# Altium PCB NANO.PcbDoc
Units mil, origin at the board's own origin, x right, y up, seen from the top; angles counter-clockwise.
Board outline 3144.78 x 2352.1 mil, 2 copper layers (Top Layer, Bottom Layer); 28 components, 29 nets, 155 pads, 73 vias.
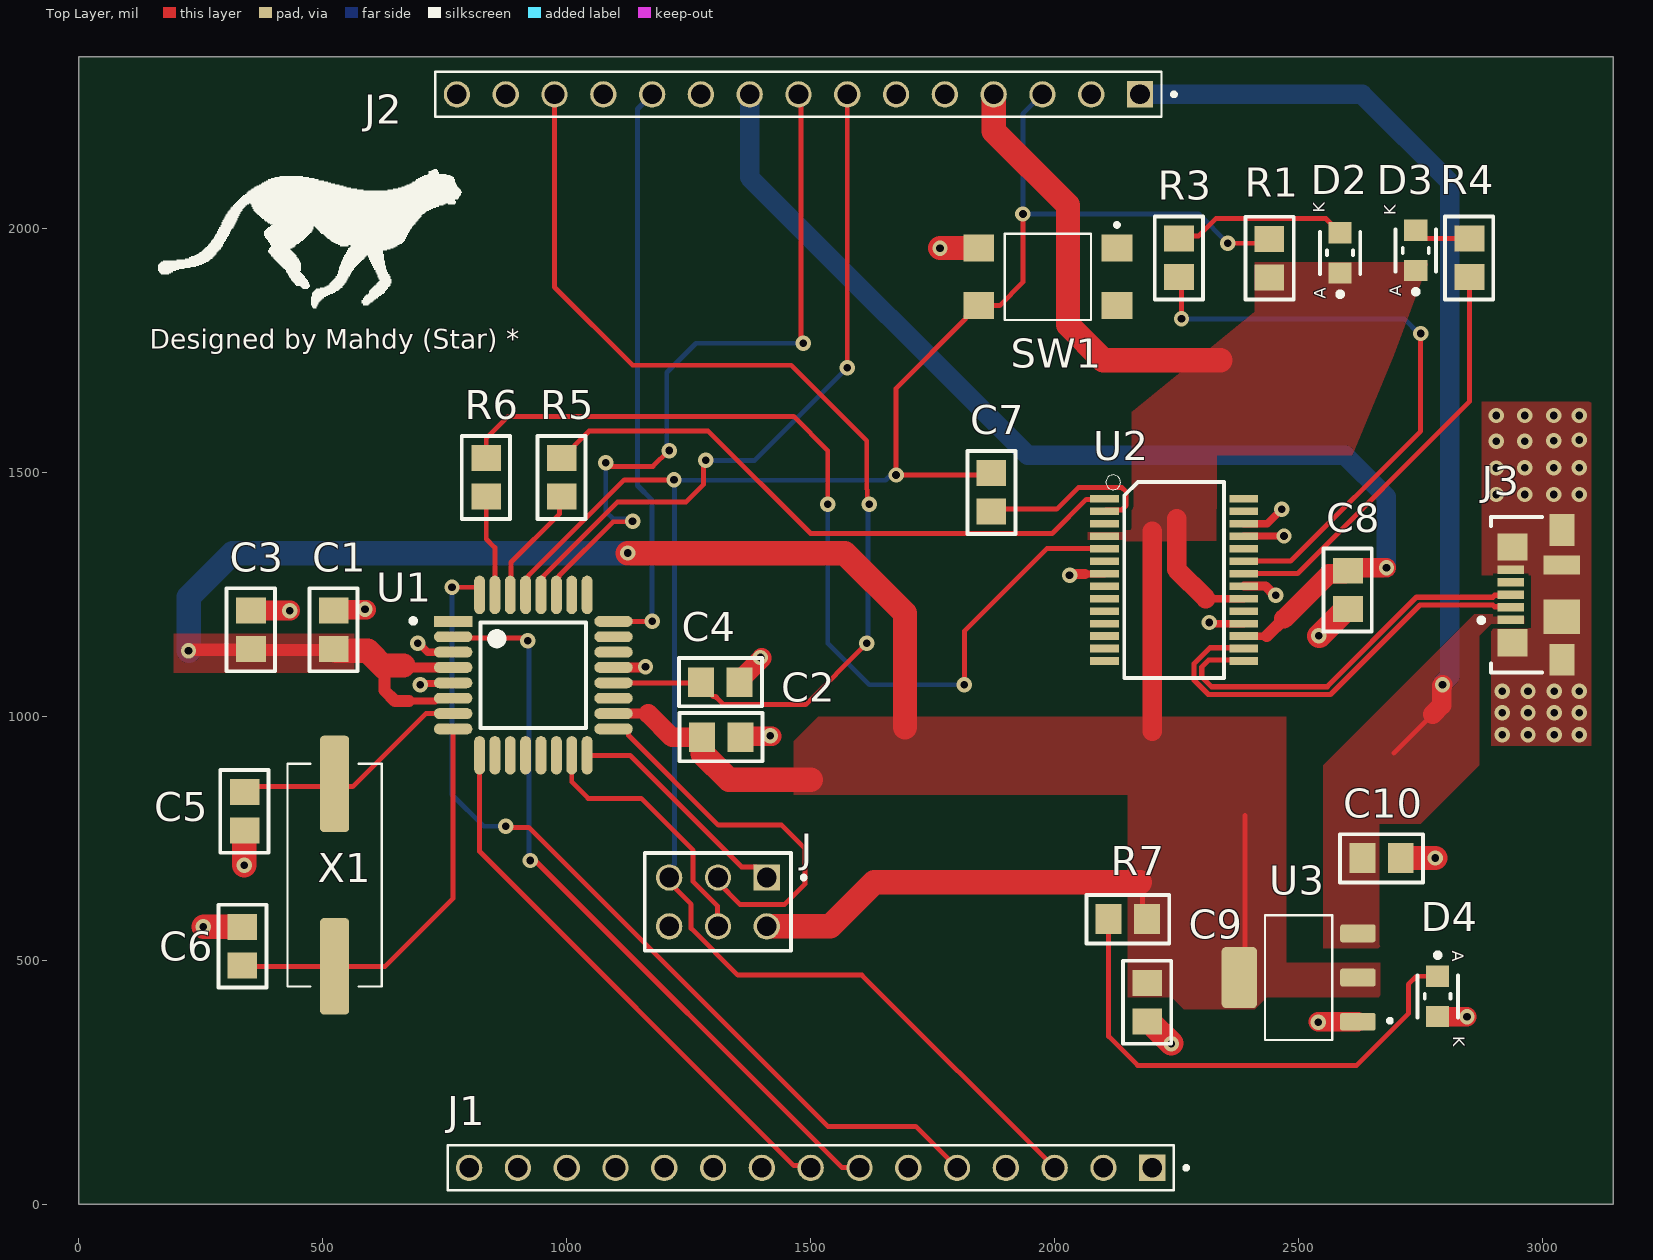
[diagram p0: Top Layer view]
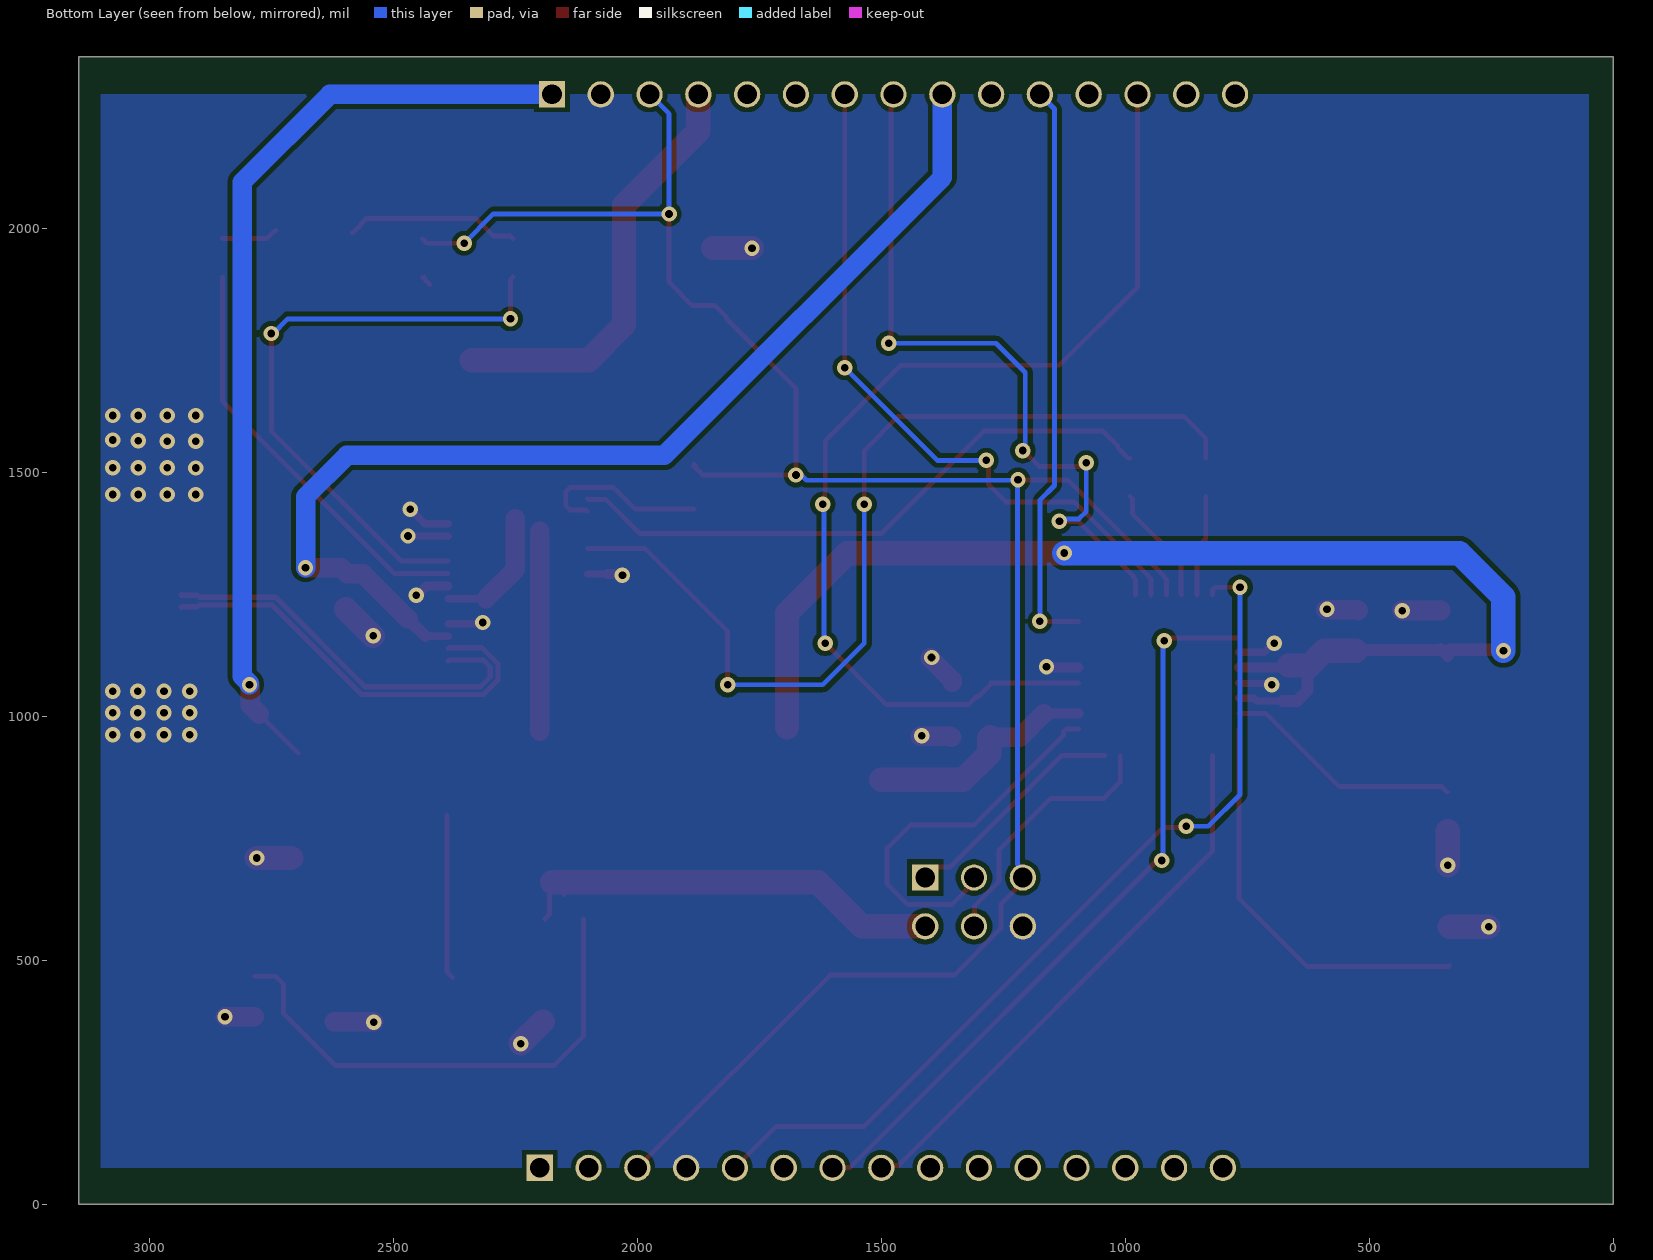
[diagram p1: Bottom Layer view, seen from below]
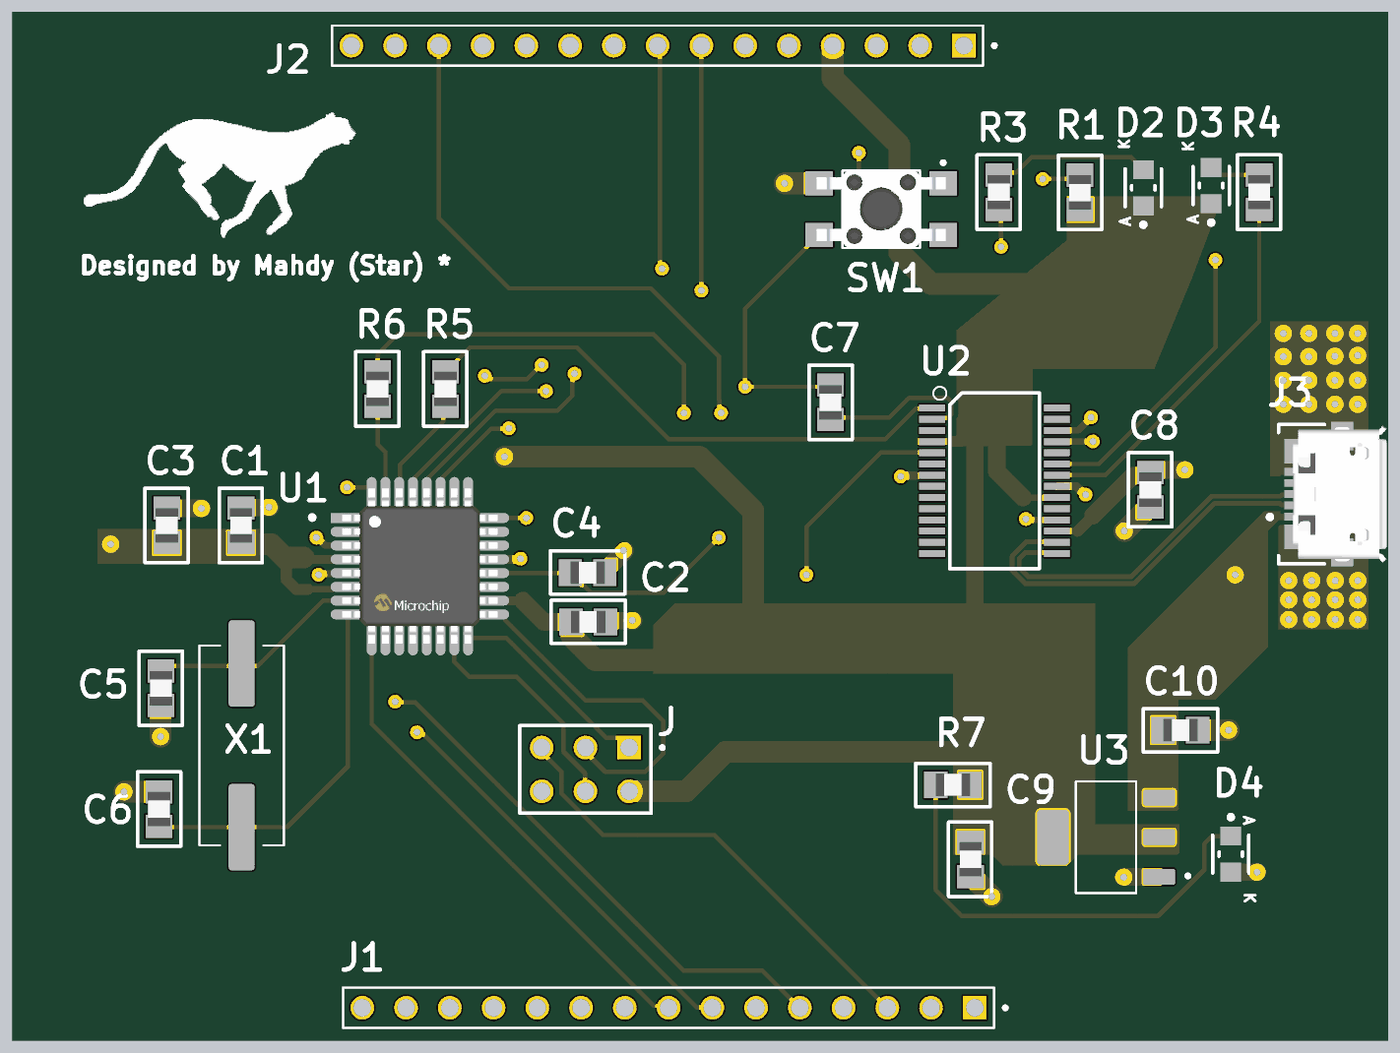
[diagram p2: 3D render of the assembled board from above, using the file's embedded part models]

## Layer stack, top to bottom
Top Solder: solder mask 0.4, Solder Resist, Dk 3.5
Top Layer: signal copper 1.4
Dielectric 1: dielectric 12.6, FR-4, Dk 4.8
Bottom Layer: signal copper 1.4
Bottom Solder: solder mask 0.4, Solder Resist, Dk 3.5

## Board outline
0,0 0,2352.1 3144.78,2352.1 3144.78,0

## Design rules (kind name [scope] priority, off if disabled: settings)
Clearance [All] p1: gap=8 ignorepadtopadclearanceinfootprint=FALSE except(0: Arc-Hole Track-Hole SMDPad-Hole THPad-Hole Via-Hole Fill-Hole Poly-Hole Region-Hole Text-Hole; 5: SMDPad-SMDPad)
DiffPairsRouting [All] p1: maxlimit=5 minlimit=5 mostfreqgap=5 toplayer_minwidth=10.97 toplayer_maxwidth=10.97 toplayer_prefwidth=10.97 bottomlayer_minwidth=10.97 bottomlayer_maxwidth=10.97 bottomlayer_prefwidth=10.97 impedanceprofiledriven=TRUE impedanceprofileid={1ABF0CBA-994F-42E9-B54F-6C99FAADA34D} impedanceprofilevalue=90.000000 maxuncoupledlength=500
MinimumSolderMaskSliver [All] p1: minsoldermaskwidth=0.5
PolygonConnect [All] p1: connectstyle=Direct reliefconductorwidth=10 reliefentries=4 polygonreliefangle="90 Angle" airgapwidth=10
RoutingVias [All] p1: holewidth=28 width=30 viastyle="Through Hole" minholewidth=10 minwidth=15 maxholewidth=30 maxwidth=50
SilkToSolderMaskClearance [IsPad] p1: minsilkscreentomaskgap=3 clearancetoexposedcopper=TRUE
SolderMaskExpansion [All] p1: expansion=4 istentingtop=FALSE
Width [All] p1: maxlimit=50 minlimit=10 preferedwidth=10
27 further rules are at their usual default settings.

## Classes and differential pairs
differential pair class DIFF90OHM: D
differential pair D: +D_P -D_N

## Components (designator, comment, footprint, x,y, rotation, side; value= is the part's Value field where it differs from the comment)
C1 "1uF" Capacitor 522.69,1177.9 r90 top
C2 "4.7uF" Capacitor 1316.38,957.28 r0 top
C3 "1uF" Capacitor 353.06,1177.9 r90 top
C4 "100nF" Capacitor 1315,1070 r0 top
C5 "22pF" Capacitor 339.95,805.63 r90 top
C6 "22pF" Capacitor 335,529.37 r270 top
C7 "100nF" Capacitor 1870,1459.37 r270 top
C8 "100nF" Capacitor 2601.06,1259.37 r90 top
C9 "1uF" Capacitor 2190,414.37 r90 top
C10 "1uF" Capacitor 2670,710 r180 top
D2 "LED Green Wurth Elektronik 150080GS75000" "LED 0508 Green SMT" 2585,1950 r90 top
D3 "LED Green Wurth Elektronik 150080GS75000" "LED 0508 Green SMT" 2740,1955 r90 top
D4 "LED Green Wurth Elektronik 150080GS75000" "LED 0508 Green SMT" 2785.09,426.45 r270 top
J "ICSP-6 Pins - 2 Rows" "ICSP 6 Pins-2 Rows" 1311.87,617.69 r180 top
J1 "15_Male_Pins" HDR_15Pins_Male 1500,75 r180 top
J2 "15_Male_Pins" HDR_15Pins_Male 1475,2275 r180 top
J3 "Micro USB Connector Molex  47346-0001" Molex_0_MFG 3025.94,1249.41 r90 top
R1 "1K Ohms" Capacitor 2440,1939.37 r270 top
R3 "1K Ohms" Capacitor 2255,1940 r90 top
R4 "1K Ohms" Capacitor 2850,1940 r90 top
R5 "1K Ohms" Capacitor 990,1490 r90 top
R6 "1K Ohms" Capacitor 835,1490 r90 top
R7 "1K Ohms" Capacitor 2150,585 r180 top
SW1 "Tactile Switch SPST-NO Top Actuated Surface Mount" SW_TL3305AF260QG 1980,1905 r270 top
U1 "ATMEGA328P-AU-Microchip" ATMEGA328P-AU 930,1085 r0 top
U2 "INTERFACE-FT232RL(SSOP28)-USB" SSOP28-0.65-10.2X5.2MM-USB 2245,1290 r270 top
U3 "Reg_5V_LM1117IMPX-5.0" LVoltageRegulator 2500,465 r180 top
X1 "Crystal Oscillator 16Mhz" "Crystal Oscillator 16Mhz" 529.25,670 r270 top

## Footprints (in the part's own frame and the unit in brackets; to place one, negate y for a bottom-side part, rotate by r counter-clockwise, add the part's x,y. Pads: shape width x height; smd on the part's side, far side on the other; paste and mask are expansions set on the pad)
ATMEGA328P-AU [mil]
  rect 78.91x22.28 smd paste+0 mask+0: 1(-162.82,109.99)
  rrect100% 78.91x22.28 smd paste+0 mask+0: 2(-162.82,78.49) 3(-162.82,47) 4(-162.82,15.5) 5(-162.82,-16) 6(-162.82,-47.49) 7(-162.82,-78.99) 8(-162.82,-110.48) 17(165.94,-110.48) 18(165.94,-78.99) 19(165.94,-47.49) 20(165.94,-16) 21(165.94,15.5) 22(165.94,47) 23(165.94,78.49) 24(165.94,109.99)
  rrect100% 22.28x78.91 smd paste+0 mask+0: 9(-108.67,-164.63) 10(-77.18,-164.63) 11(-45.68,-164.63) 12(-14.19,-164.63) 13(17.31,-164.63) 14(48.81,-164.63) 15(80.3,-164.63) 16(111.8,-164.63) 25(111.8,164.13) 26(80.3,164.13) 27(48.81,164.13) 28(17.31,164.13) 29(-14.19,164.13) 30(-45.68,164.13) 31(-77.18,164.13) 32(-108.67,164.13)
  silkscreen extent -249,-109 110,116, body extent -222,-224 225,223, height 10
Capacitor [mm]
  rect 1.35x1.55 smd: 1(-1,0) 2(1,0)
  silkscreen extent -2.16,-1.24 2.16,1.27, body extent -1,-0.65 1,0.66, height 0.73
"Crystal Oscillator 16Mhz" [mm]
  rrect25% 5.01x1.51 smd: 1(-4.877,-0.127) 2(4.623,-0.127)
  silkscreen extent -5.93,-2.58 5.67,2.32
HDR_15Pins_Male [mm]
  rect 1.37x1.37 hole 1.02: 1(-17.78,0)
  round 1.37 hole 1.02: 2(-15.24,0) 3(-12.7,0) 4(-10.16,0) 5(-7.62,0) 6(-5.08,0) 7(-2.54,0) 8(0,0) 9(2.54,0) 10(5.08,0) 11(7.62,0) 12(10.16,0) 13(12.7,0) 14(15.24,0) 15(17.78,0)
  silkscreen extent -19.65,-1.17 18.9,1.17
"ICSP 6 Pins-2 Rows" [mm]
  rect 1.37x1.37 hole 1.02: 01(-2.493,-1.329)
  round 1.37 hole 1.02: 02(-2.493,1.211) 03(0.047,-1.329) 04(0.047,1.211) 05(2.587,-1.329) 06(2.587,1.211)
  silkscreen extent -4.51,-2.6 3.86,2.48
"LED 0508 Green SMT" [mm]
  rect 1.1x1.2 smd paste+0 mask+0: 1(-1.047,-0.002) 2(1.053,-0.002)
  silkscreen extent -2.27,-1.05 1.1,1.05, body extent -1.7,-0.78 1.7,0.77, height 0.25
LVoltageRegulator [mm]
  rrect25% 1.84x0.93 smd: 1(-3.085,2.3) 2(-3.085,0) 3(-3.085,-2.3)
  rrect25% 1.84x3.19 smd: 4(3.085,0)
  silkscreen extent -4.85,-3.25 1.75,3.25
Molex_0_MFG [mm]
  rect 0.45x1.38 smd paste+0 mask+0: 1(-1.3,2.31) 2(-0.65,2.31) 3(0,2.31) 4(0.65,2.31) 5(1.3,2.31)
  rect 1.425x1.55 smd paste+0 mask+0: 6(-2.488,2.225) 7(2.487,2.225)
  rect 1.65x1.3 smd paste+0 mask+0: 8(-3.375,-0.35) 11(3.375,-0.35)
  rect 1.8x1.9 smd paste+0 mask+0: 9(-1.15,-0.35)
  rect 1x1.9 smd paste+0 mask+0: 10(1.55,-0.35)
  silkscreen extent -4.04,0.68 4.05,3.97, body extent -4.3,-2.48 4.3,3.45, height 0.25
SSOP28-0.65-10.2X5.2MM-USB [mm]
  rect 0.4x1.5 smd: 1(-3.971,-3.625) 2(-3.321,-3.625) 3(-2.671,-3.625) 4(-2.021,-3.625) 5(-1.371,-3.625) 6(-0.721,-3.625) 7(-0.071,-3.625) 8(0.579,-3.625) 9(1.229,-3.625) 10(1.879,-3.625) 11(2.529,-3.625) 12(3.179,-3.625) 13(3.829,-3.625) 14(4.479,-3.625) 15(4.479,3.625) 16(3.829,3.625) 17(3.179,3.625) 18(2.529,3.625) 19(1.879,3.625) 20(1.229,3.625) 21(0.579,3.625) 22(-0.071,3.625) 23(-0.721,3.625) 24(-1.371,3.625) 25(-2.021,3.625) 26(-2.671,3.625) 27(-3.321,3.625) 28(-3.971,3.625)
  silkscreen extent -5.21,-3.55 5.35,2.6
SW_TL3305AF260QG [mm]
  rect 1.4x1.6 smd: 1(-1.403,3.752) 2(-1.403,-3.448) 3(1.597,3.752) 4(1.597,-3.448)
  silkscreen extent -2.7,-2.1 2.35,3.85, body extent -2.15,-3.6 2.35,3.9, height 3.8

## Part data
C1 C3 C9 C10: library part Cap_0805_1uF
C2: library part Cap_0805_4.7uF
C4 C7 C8: library part Cap_0805_100nF
C5 C6: library part Cap_0805_22uF
D2 D3 D4: "WURTH ELEKTRONIK - 150080GS75000 - LED, Green, SMD, 0805, 30 mA, 3.2 V, 520 nm"
J: "6 Pins - 2 RowsSAMTEC_TSW-103-07-T-D"
J1 J2: library part HDR_15Pins_Male
J3: "PN-473460001"
R1 R3 R4 R5 R6 R7: library part Resistor, "1K Ohms Resistor"
SW1: "TL3305 Series Tact Switch"
U1: "MICROCONTROLLER MCU, 8 BIT, ATMEGA, 20MH; 20MHZ, TQFP-32; Controller Family/Series: ATmega; CPU Speed: 20MHz"
U2: "USB Bridge, USB to UART USB 2.0 UART Interface 28-SSOP"
U3: "Linear Voltage Regulator IC 1 Output 800mA SOT-223-4"
X1: "16MHz Â±30ppm Crystal 16pF 40 Ohms HC-49/US"

## Via types
v1: diameter 31.5, hole 15.75, Top Layer to Bottom Layer, 73 vias

## Nets (pads, with @x,y where several pads share a name; then routed paths per layer and width w, separated by ;. In a path a pad name is that pad's centre, name@x,y a point inside that pad or via, vN(x,y) a via of type N, cw(c..) or ccw(c..) an arc to the next point about the centre after c; other vN are vias at no path point)
+3V3: C8.2 J2.9 U2.17 | length 2241.9
  Top Layer w15: U2.17 2387.77,1164.79 2434.79,1164.79
  Top Layer w25: 2434.79,1164.79 2470,1200
  Top Layer w40: 2470,1200 2562.17,1292.17 2594.49,1292.17 2607.32,1305 v1(2680,1305)
  Bottom Layer w40: J2.9 1375,2105 1945,1535 2595.4,1535 2680,1450.4 v1(2680,1305)
+5V: C1.1 C2.1 C3.1 C9.2 D2.1 D3.1 J2.4 J.02 R1.2 R7.1 U1.4 U1.6 U1.18 U2.4 U2.20 U3.2 U3.4 | length 6019.1
  Top Layer w10: 2150,635 2175,660 2180,665 2180,594.37 R7.1 ; U3.4 2390,476.46 2390,797.22 ; R1.2@2425,1885 R1.2 R1.2@2436.06,1900
  Top Layer w15: 676.87,1031.87 731.25,1031.87 736.89,1037.51 U1.6 ; 2310,1241.61 U2.20
  Top Layer w20: 665.53,1104.47 669.5,1100.5 U1.4 ; U1.18@1095.59,1006.37 U1.18 1167.14,1006.01
  Top Layer w25: v1(225,1135) 226.76,1136.76 335.05,1136.76 338.99,1132.83 338.99,1124.45 C3.1 ; C3.1@353.06,1136.62 C1.1@526.17,1136.62 ; C1.1@526.17,1139.28 C1.1@528.08,1137.36 ; 626.26,1100.5 626.26,1053.74 648.13,1031.87 676.87,1031.87 ; 1485,570 1490,575 ; 1690,975 1693.28,978.28
  Top Layer w40: 1167.14,1006.01 1215.87,957.28 C2.1 ; 2200,970 2200,1380 ; 2250,1405 2250,1301.61 2310,1241.61
  Top Layer w50: C1.1@528.08,1134.7 592.06,1134.7 626.26,1100.5 630.23,1104.47 665.53,1104.47 ; v1(1125,1335) 1570,1335 1693.28,1211.72 1693.28,978.28 ; C2.1 1278.58,955.71 1278.58,924.05 1332.63,870 1500,870 ; J.02 1485,570 1540,570 1630,660 2175,660 ; J2.4 1875,2199.75 2027.32,2047.42 2027.32,1802.68 2099.64,1730.36 2340,1730.36
  Bottom Layer w10: J.02 J.02@1415,565
  Bottom Layer w50: v1(225,1135) 225,1245 315,1335 v1(1125,1335)
A1: J2.11 U1.24 | length 1183.9
  Top Layer w10: U1.24@1095.95,1194.99 v1(1175,1195)
  Bottom Layer w10: v1(1175,1195) 1175,1443.43 1145,1473.43 1145,2245 J2.11
A4: J2.8 U1.27 | length 1529.4
  Top Layer w10: U1.27 978.81,1280.77 984.16,1286.13 984.16,1288.28 1095,1399.12 1134.12,1399.12 v1(1135,1400) ; v1(1080,1520) 1087.5,1512.5 1176.68,1512.5 1209.18,1545 v1(1210,1545) ; J2.8 1480,2270 1480,1770 v1(1485,1765)
  Bottom Layer w10: v1(1080,1520) 1080,1420 1095,1405 1130,1405 v1(1135,1400) ; v1(1210,1545) 1205,1550 1205,1705 1265,1765 v1(1485,1765)
A5: J2.7 U1.28 | length 1426.8
  Top Layer w10: U1.28 947.31,1280.77 952.67,1286.13 952.67,1288.28 1104.39,1440 1245,1440 1280,1475 1280,1520 v1(1285,1525) ; v1(1575,1715) J2.7
  Bottom Layer w10: v1(1285,1525) 1385,1525 v1(1575,1715)
AREF: C4.1 J2.13 U1.20 | length 2177.2
  Top Layer w10: J2.13 975,1880 1135,1720 1460,1720 1615,1565 1615,1465.75 1615.89,1464.86 1615.89,1439.11 v1(1620,1435) ; U1.20 1274.63,1069 C4.1 1275.63,1066.06 1300.61,1041.09 1304.99,1041.09 1312.8,1033.28 1321.58,1024.49 1489.49,1024.49 v1(1615,1150)
  Bottom Layer w10: v1(1615,1150) 1617.5,1152.5 1617.5,1432.5 v1(1620,1435)
D0/RX: R5.1 U1.30 | length 245.3
  Top Layer w10: U1.30 885.83,1250.65 885.83,1315.83 984.91,1414.91 984.91,1445.54 R5.1
D1/TX: R6.1 U1.31 | length 208.9
  Top Layer w10: R6.1 835,1363.83 852.82,1346 U1.31
D2: J1.5 U1.32 | length 1845.7
  Top Layer w10: v1(765,1265) 815.65,1265 821.33,1259.33 U1.32 ; v1(875,775) 877.08,772.92 922.08,772.92 1535,160 1715,160 J1.5
  Bottom Layer w10: v1(765,1265) 765,840 830,775 v1(875,775)
D4: J1.7 U1.2 | length 1544.4
  Top Layer w10: U1.2 769.53,1161.14 913.86,1161.14 v1(920,1155) ; v1(925,705) 935,705 1563.89,76.11 1598.89,76.11 J1.7
  Bottom Layer w10: v1(920,1155) 922.5,1152.5 922.5,707.5 v1(925,705)
D5: J1.8 U1.9 | length 1144.1
  Top Layer w10: U1.9 821.33,723.67 1465.32,79.68 1495.32,79.68 J1.8
D11/MOSI: J.04 U1.15 | length 538.2
  Top Layer w10: U1.15 1010.3,865.91 1044.01,832.2 1152.8,832.2 1259.15,725.85 1259.15,661.49 1308.68,611.97 1308.68,571.32 J.04
D12/MIS0: J.01 U1.16 | length 471.9
  Top Layer w10: U1.16 1129.74,920.37 1358.14,691.97 1388.03,691.97 J.01
D13_SCK: J.03 U1.17 | length 795.5
  Top Layer w10: U1.17 1120.94,974.52 1126.61,968.84 1126.61,961.46 1310.62,777.45 1440.83,777.45 1488.11,730.17 1488.11,656.22 1446.89,615 1355,615 1310,660 J.03
D_N: J3.2 U2.16 | length 889.9
  Top Layer w10.97: U2.16 2386,1140.97 2318.38,1140.97 2285.49,1108.07 2285.49,1074.51 2315,1045 2565,1045 2748.63,1228.63 2897.86,1228.63 2901.42,1225.07 2933.75,1225.07 J3.2
D_P: J3.3 U2.15 | length 833.4
  Top Layer w10.97: U2.15 2385.49,1115.89 2315.89,1115.89 2301.46,1101.46 2301.46,1081.13 2321.62,1060.97 2558.38,1060.97 2742.01,1244.6 2897.86,1244.6 2901.42,1248.16 2933.75,1248.16 J3.3
GND: C1.2 C2.2 C3.2 C4.2 C5.1 C6.1 C8.1 C9.1 C10.1 D4.2 J1.4 J2.2 J3.5 J3.6 J3.7 J3.8 J3.9 J3.10 J3.11 J.06 SW1.2 U1.3 U1.5 U1.21 U2.7 U2.18 U2.21 U2.25 U2.26 U3.1 | length 1481.8
  Top Layer w10: v1(695,1150) v1@697.47,1150 ; U2.7@2101.49,1292.07 U2.7
  Top Layer w15: C5.1@339.01,765.32 C5.1 ; v1@697.47,1150 715.47,1132 U1.3 ; v1(700,1065) 702.61,1067.61 765.79,1067.61 U1.5 ; 2062.88,1292.07 U2.7@2101.49,1292.07 ; v1@2315,1190.43 U2.18 ; U2.25 2387.93,1369.78 2469.78,1369.78 v1(2470,1370) ; U2.26 2435.83,1395.16 v1(2465.67,1425)
  Top Layer w18: U2.21 2432.24,1267.21
  Top Layer w20: U1.21 v1@1164.5,1100.5 ; v1@2030,1292.07 2062.88,1292.07 ; 2432.24,1267.21 2451.08,1248.37 v1(2453.36,1248.37)
  Top Layer w40: v1@339.95,695.05 v1@340,695 ; C3.2 v1@433.8,1217.27 ; C1.2 524.24,1218.83 v1@589.61,1218.83 ; C4.2 1354.37,1073.94 1400,1119.57 v1@1400,1120 ; C2.2 1358.47,960 v1@1420,960 ; v1(1765,1960) v1@1765.24,1960.24 ; C9.1 C9.1@2193.94,375 ; v1@2238.86,329.89 v1@2238.86,330.08 ; v1@2540.55,374.45 U3.1 ; C8.1@2597.13,1220 C8.1 ; D4.2 v1(2845,385)
  Top Layer w50: v1@256.26,568.74 C6.1 ; v1(339.01,695.07) C5.1@339.01,765.32 ; v1@1765.24,1960.24 SW1.2 ; C9.1@2193.94,375 v1@2238.86,330.08 ; v1@2542.13,1165 C8.1@2597.13,1220 ; C10.1 v1(2780,710)
  other v1: 2238.71,329.19 2540.41,373.56 255.27,568.81 1417,960.89 2917.45,962.78 2970,962.78 3023.74,962.78 3075.26,962.78 2917.45,1007.72 2970,1007.72 3023.74,1007.72 3075.26,1007.72 2917.45,1051.86 2970,1051.86 3023.74,1051.86 3075.26,1051.86 1161.5,1101.82 1397,1120.89 2541.56,1165.3 2316.64,1192.68 432.17,1216.86 586.6,1219.72 2030.58,1289.75 2905,1455 2963.43,1455 3023,1455 3075,1455 2905,1509.36 2963.43,1510 3023,1510 3075,1510 2905,1563.95 2963.43,1563.95 3023,1564.88 3075,1566.72 2905,1617 2963.43,1617 3023,1617 3075,1617
NetC5_2: C5.2 U1.7 X1.1 | length 493.9
  Top Layer w10: C5.2 351.28,856.33 522.44,856.33 561.3,856.33 710.99,1006.01 U1.7
NetC6_2: C6.2 U1.8 X1.2 | length 838
  Top Layer w10: C6.2 337.01,487.99 530,487.99 627.99,487.99 767.18,627.18 U1.8
NetC7_2: C7.2 U2.2 | length 362.5
  Top Layer w10: C7.2@1883.74,1425 2004.39,1425 2048.6,1469.21 2138.02,1469.21 2146.81,1460.43 2146.81,1432.25 2138.02,1423.47 2105,1423.47 U2.2
NetD2_2: D2.2 R3.2 | length 360.2
  Top Layer w10: R3.2 2260.28,1984.65 2294.65,1984.65 2330.31,2020.31 2556.22,2020.31 2566.47,2010.07 2566.47,2008.1 2583.12,1991.45 D2.2
NetD3_2: D3.2 R4.2 | length 117
  Top Layer w10: D3.2 2742.06,1996.45 2759.14,1979.37 R4.2
NetD4_1: D4.1 R7.2 | length 1050.3
  Top Layer w10: R7.2 2110.63,344.37 2170,285 2618.89,285 2725,391.11 2725,450.98 2741.69,467.68 D4.1
NetR3_1: R3.1 U2.23 | length 1262.8
  Top Layer w10: R3.1 2260,1895.63 v1(2260,1815) ; U2.23 2483.39,1318.39 2750,1585 v1(2750,1785)
  Bottom Layer w10: v1(2260,1815) 2716.36,1815 2746.36,1785 v1(2750,1785)
NetR4_1: R4.1 U2.22 | length 863.8
  Top Layer w10: U2.22 2497.8,1292.8 2850,1645 R4.1
Reset: C7.1 J1.3 J2.3 J.05 R1.1 SW1.4 U1.29 | length 4458.3
  Top Layer w10: U1.29 915.81,1280.77 921.17,1286.13 921.17,1288.28 1117.89,1485 v1(1220,1485) ; J.05 1210,660 1255,615 1255,565.65 1350.65,470 1605,470 J1.3 ; C7.1@1880.63,1514.37 C7.1@1883.45,1517.19 ; C7.1@1885,1513.74 1866.26,1495 v1(1675,1495) 1675,1672.87 1817.76,1815.63 1817.76,1819.57 1840.32,1842.13 SW1.4 1887.13,1842.13 1935,1890 v1(1935,2030) ; v1(2355,1970) 2431.26,1970 R1.1
  Bottom Layer w10: J.05 1218.41,678.41 1218.41,695.41 1220.82,697.83 v1@1220.82,1484.18 ; v1(1220,1485) v1@1220.82,1484.18 ; v1(1675,1495) 1664.18,1495 1653.35,1484.18 v1@1220.82,1484.18 ; J2.3 1935,2235 v1(1935,2030) 2295,2030 v1(2355,1970)
RX: R5.2 U2.1 | length 1254.2
  Top Layer w10: R5.2 993.94,1529.37 1015.51,1550.94 1015.51,1554.88 1045.63,1585 1290,1585 1500,1375 1995,1375 2065,1445 2100.95,1445 U2.1
TX: R6.2 U2.5 | length 1966.2
  Top Layer w10: R6.2 835,1570 880,1615 1465,1615 1535,1545 v1(1535,1435) ; v1(1815,1065) 1815,1175 1984.49,1344.49 2101.77,1344.49 U2.5
  Bottom Layer w10: v1(1535,1435) 1535,1150 1620,1065 v1(1815,1065)
Vin: C10.2 J2.1 J3.1 U3.3 | length 1927.2
  Top Layer w10: 2695,925 2775,1005
  Top Layer w40: 2775,1005 2793.09,1023.09 2793.09,1063.09 v1(2795,1065)
  Bottom Layer w40: J2.1 2630,2275 2810,2095 2810,1082.71 2795,1067.71 v1(2795,1065)
pads on no net: J1.1 J1.2 J1.6 J1.9 J1.10 J1.11 J1.12 J1.13 J1.14 J1.15 J2.5 J2.6 J2.10 J2.12 J2.14 J2.15 J3.4 SW1.1 SW1.3 U1.1 U1.10 U1.11 U1.12 U1.13 U1.14 U1.19 U1.22 U1.23 U1.25 U1.26 U2.3 U2.6 U2.8 U2.9 U2.10 U2.11 U2.12 U2.13 U2.14 U2.19 U2.24 U2.27 U2.28

## Polygon pours and split planes (outlines as drawn)
GND on Top Layer "GND_L01_P011" (solid, remove dead copper, pour order 11): 3100,1650 3095,1645 2875,1645 2875,1311.54 2875.11,1311.43 2875,1311.32 2875,1290 2976.89,1290 2976.89,1181.06 2894.06,1181.06 2894.32,1180.8 2894.32,940.68 2895.22,939.78 3100.11,939.78 3100.11,944.89 3100,945
+5V on Top Layer "+5V_L01_P006" (solid, remove dead copper, pour order 6): 2475.07,999.5 1515.07,999.5 1465.07,949.5 1465.07,839.5 2475.07,839.5
+5V on Top Layer "+5V_L01_P005" (solid, remove dead copper, pour order 5): 2067.93,1360.87 2067.93,1382.18 2154.52,1382.18 2158.51,1386.18 2158.51,1625 2333.06,1625 2331.08,1360.64 2071.93,1356.87
+5V on Top Layer "+5V_L01_P002" (solid, remove dead copper, pour order 2): 2667.52,428.33 2664.19,425 2435,425 2410,400 2264.39,400 2238.86,425.53 2238.33,425 2150,425 2150,745 2150,865 2070,865 2475,865 2475,495 2667.18,495 2667.52,494.66
Vin on Top Layer "VIN_L01_P000" (solid, remove dead copper, pour order 0): 2907.34,1207.33 2962.67,1207.33 2962.67,1190 2894.75,1190 2870,1165.25 2870,900 2750,780 2665,780 2665,532.19 2667.52,529.67 2662.85,525 2550,525 2550,900 2675,1025 2860,1210 2905,1210 2910,1205
+5V on Top Layer "+5V_L01_P007" (solid, remove dead copper, pour order 7): 550,1170 195,1170 195,1090 564.83,1090 565,1089.83 565,1170
+5V on Top Layer "+5V_L01_P009" (solid, remove dead copper, pour order 9): 2156.76,1623.24 2410,1830 2410,1930.57 2766.67,1930.57 2695,1740 2610,1535 2245,1535
GND on Bottom Layer "GND_L02_P010" (solid, remove dead copper, pour order 10): 3100,2275 3100,75 50,75 50,2275

## Silkscreen, mask and mechanical layers (free items; w line width, h text height)
Top Overlay:
  region: 1128 vertices and 0 holes, not listed, extent 162.63,1836.34 785.05,2121.97
  text "Designed by Mahdy (Star) *" at 145,1753.33 h40
Mechanical 1:
  lines w39.37: 0,0 0,2352.1 3144.78,2352.1 3144.78,9.78 3135,0 0,0

## Text inside footprints (layer, text, board x,y; h text height)
D2: Top Overlay "A" at 2555.36,1856.23 h23.62 r90; Top Overlay "K" at 2553.29,2031.99 h23.62 r90
D3: Top Overlay "A" at 2710.36,1861.23 h23.62 r90; Top Overlay "K" at 2699.58,2026.83 h23.62 r90
D4: Top Overlay "K" at 2816.8,344.46 h23.62 r270; Top Overlay "A" at 2814.74,520.21 h23.62 r270